# Altium PCB ZERORULERV2.PcbDoc (part 2 of 2)
Units mm, origin at the board's own origin, x right, y up, seen from the top; angles counter-clockwise.
Board outline 204.36 x 30 mm, 2 copper layers (Top, Bottom), stack 1.569 mm thick; 78 components, 0 nets, 1415 pads, 0 vias.
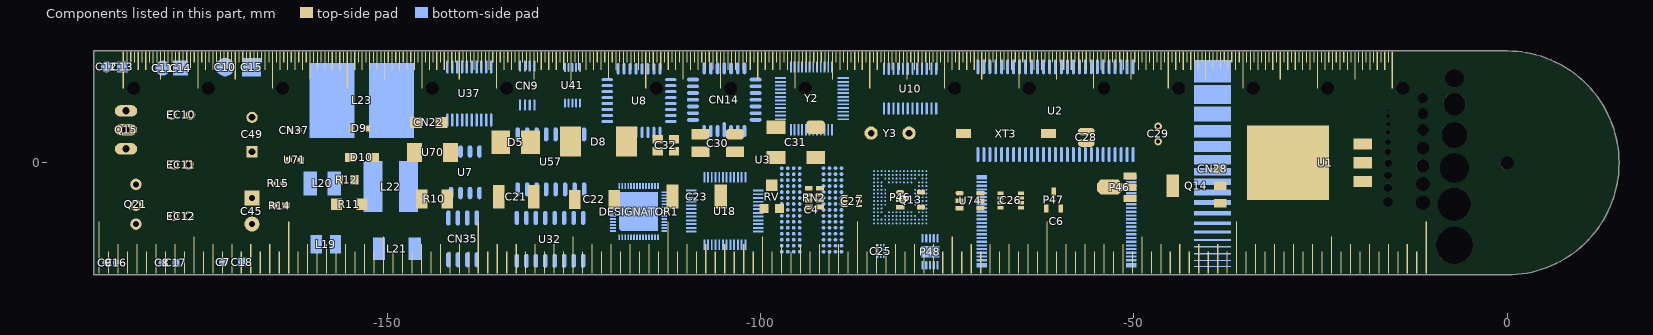
[diagram p2: the components of this part, seen from the top]

## Nets (pads, with @x,y where several pads share a name; then routed paths per layer and width w, separated by ;. In a path a pad name is that pad's centre, name@x,y a point inside that pad or via, vN(x,y) a via of type N, cw(c..) or ccw(c..) an arc to the next point about the centre after c; other vN are vias at no path point) (continued)
copper on no net: | length 2810.4
  Top w0.1: 0,-15 0,-11 ; 0,-9 0,-5 ; 0,-3 0,-0.9 ; 0,11 0,15 ; 0.157,-0.886 0.521,-2.954 ; 0.156,0.886 0.521,2.954 ; 0.241,-13.79 0.262,-14.998 ; 0.241,13.79 0.262,14.998 ; 0.307,0.846 1.026,2.819 ; 0.308,-0.846 1.026,-2.819 ; 0.436,-4.981 0.784,-8.966 ; 0.436,4.981 0.784,8.966 ; 0.45,0.78 1.5,2.598 ; 0.45,-0.779 1.5,-2.598 ; 0.481,-13.784 0.524,-14.991 ; 0.481,13.784 0.523,14.991 ; 0.578,0.69 1.928,2.298 ; 0.579,-0.689 1.929,-2.298 ; 0.69,-0.578 2.298,-1.928 ; 0.689,0.579 2.298,1.929 ; 0.722,-13.773 0.785,-14.979 ; 0.722,13.773 0.785,14.979 ; 0.78,-0.45 2.598,-1.5 ; 0.779,0.45 2.598,1.5 ; 0.846,-0.307 2.819,-1.026 ; 0.846,0.308 2.819,1.026 ; 0.868,-4.924 1.563,-8.863 ; 0.868,4.924 1.563,8.863 ; 0.886,-0.156 2.954,-0.521 ; 0.886,0.157 2.954,0.521 ; 0.962,-13.759 1.046,-14.963 ; 0.962,13.759 1.046,14.963 ; 1.133,-12.951 1.307,-14.943 1.202,-13.74 ; 1.133,12.951 1.307,14.943 ; 1.294,-4.83 2.329,-8.693 ; 1.294,4.83 2.329,8.693 ; 1.442,-13.717 1.568,-14.918 ; 1.442,13.717 1.568,14.918 ; 1.681,-13.689 1.828,-14.888 ; 1.681,13.689 1.828,14.888 ; 1.71,-4.698 3.078,-8.457 ; 1.71,4.698 3.078,8.457 ; 1.91,-10.833 2.605,-14.772 ; 1.91,10.833 2.605,14.772 ; 1.919,-13.658 2.088,-14.854 ; 1.92,13.658 2.088,14.854 ; 2.113,-4.532 3.804,-8.157 ; 2.113,4.532 3.804,8.157 ; 2.158,-13.622 2.347,-14.815 ; 2.158,13.622 2.347,14.815 ; 2.5,-4.33 4.5,-7.794 ; 2.5,4.33 4.5,7.794 ; 2.632,-13.539 2.862,-14.724 ; 2.632,13.539 2.862,14.724 ; 2.868,-13.491 3.119,-14.672 ; 2.868,-4.096 5.162,-7.372 ; 2.868,4.096 5.162,7.372 ; 2.868,13.491 3.119,14.672 ; 3.103,-13.439 3.374,-14.616 ; 3.103,13.439 3.374,14.616 ; 3.214,-3.83 5.785,-6.894 ; 3.214,3.83 5.785,6.894 ; 3.337,-13.382 3.629,-14.554 ; 3.337,13.382 3.629,14.554 ; 3.365,-12.557 3.882,-14.489 3.57,-13.322 ; 3.365,12.557 3.882,14.489 3.57,13.322 ; 3.536,-3.536 6.364,-6.364 ; 3.536,3.536 6.364,6.364 ; 3.762,-10.337 5.13,-14.095 ; 3.762,10.337 5.13,14.095 ; 3.802,-13.258 4.135,-14.419 ; 3.802,13.258 4.135,14.419 ; 3.83,-3.214 6.894,-5.785 ; 3.83,3.214 6.894,5.785 ; 4.032,-13.19 4.386,-14.345 ; 4.032,13.19 4.386,14.345 ; 4.096,-2.868 7.372,-5.162 ; 4.096,2.868 7.372,5.162 ; 4.262,-13.117 4.635,-14.266 ; 4.262,13.117 4.635,14.266 ; 4.33,-2.5 7.794,-4.5 ; 4.33,2.5 7.794,4.5 ; 4.49,-13.041 4.884,-14.183 ; 4.49,13.041 4.884,14.183 ; 4.532,-2.113 8.157,-3.804 ; 4.532,2.113 8.157,3.804 ; 4.698,-1.71 8.457,-3.078 ; 4.698,1.71 8.457,3.078 ; 4.83,-1.294 8.693,-2.329 ; 4.83,1.294 8.693,2.329 ; 4.924,-0.868 8.863,-1.563 ; 4.924,0.868 8.863,1.563 ; 4.943,-12.876 5.376,-14.004 ; 4.943,12.876 5.376,14.004 ; 4.981,-0.436 8.966,-0.784 ; 4.981,0.436 8.966,0.784 ; 5.167,-12.788 5.619,-13.908 ; 5.167,12.788 5.619,13.908 ; 5.389,-12.696 5.861,-13.808 ; 5.389,12.696 5.861,13.808 ; 5.494,-11.782 6.339,-13.595 5.829,-12.5 ; 5.494,11.782 6.339,13.595 5.829,12.5 ; 5.5,-9.526 7.5,-12.99 ; 5.5,9.526 7.5,12.99 ; 5.61,-12.6 6.101,-13.703 ; 5.61,12.6 6.101,13.703 ; 6.046,-12.396 6.576,-13.482 ; 6.046,12.396 6.576,13.482 ; 6.262,-12.289 6.81,-13.365 ; 6.262,12.289 6.81,13.365 ; 6.475,-12.178 7.042,-13.244 ; 6.475,12.178 7.042,13.244 ; 6.687,-12.063 7.272,-13.119 ; 6.687,12.063 7.272,13.119 ; 7.071,-8.426 9.642,-11.491 ; 7.071,8.426 9.642,11.491 ; 7.103,-11.822 7.726,-12.858 ; 7.104,11.822 7.726,12.858 ; 7.309,-11.696 7.949,-12.721 ; 7.309,11.696 7.949,12.721 ; 7.456,-10.649 8.604,-12.287 7.911,-11.298 ; 7.456,10.649 8.604,12.287 7.911,11.298 ; 7.512,-11.567 8.17,-12.58 ; 7.512,11.567 8.17,12.58 ; 7.712,-11.434 8.388,-12.436 ; 7.713,11.434 8.388,12.436 ; 8.107,-11.158 8.817,-12.135 ; 8.107,11.158 8.817,12.135 ; 8.3,-11.015 9.027,-11.98 ; 8.3,11.015 9.027,11.98 ; 8.426,-7.071 11.491,-9.642 ; 8.426,7.071 11.491,9.642 ; 8.491,-10.868 9.235,-11.82 ; 8.491,10.868 9.235,11.82 ; 8.68,-10.719 9.44,-11.657 ; 8.68,10.719 9.44,11.657 ; 9.048,-10.409 9.841,-11.321 ; 9.048,10.409 9.841,11.321 ; 9.192,-9.192 10.607,-10.607 9.753,-9.753 ; 9.192,9.192 10.607,10.607 9.753,9.753 ; 9.229,-10.25 10.037,-11.147 ; 9.229,10.25 10.037,11.147 ; 9.406,-10.087 10.23,-10.97 ; 9.406,10.087 10.23,10.97 ; 9.526,-5.5 12.99,-7.5 ; 9.526,5.5 12.99,7.5 ; 9.581,-9.921 10.42,-10.79 ; 9.581,9.921 10.42,10.79 ; 9.921,-9.581 10.79,-10.42 ; 9.921,9.581 10.79,10.42 ; 10.087,-9.406 10.97,-10.23 ; 10.087,9.406 10.97,10.23 ; 10.25,-9.229 11.147,-10.037 ; 10.25,9.229 11.147,10.037 ; 10.337,-3.762 14.095,-5.13 ; 10.337,3.762 14.095,5.13 ; 10.409,-9.048 11.321,-9.841 ; 10.409,9.048 11.321,9.841 ; 10.649,-7.456 12.287,-8.604 11.298,-7.911 ; 10.649,7.456 12.287,8.604 11.298,7.911 ; 10.719,-8.68 11.657,-9.44 ; 10.719,8.68 11.657,9.44 ; 10.833,-1.91 14.772,-2.605 ; 10.833,1.91 14.772,2.605 ; 10.868,-8.491 11.82,-9.235 ; 10.868,8.491 11.82,9.235 ; 11,0 15,0 ; 11.015,-8.3 11.98,-9.027 ; 11.015,8.3 11.98,9.027 ; 11.158,-8.107 12.135,-8.817 ; 11.158,8.107 12.135,8.817 ; 11.434,-7.712 12.436,-8.388 ; 11.434,7.712 12.436,8.388 ; 11.567,-7.512 12.58,-8.17 ; 11.567,7.512 12.58,8.17 ; 11.696,-7.309 12.721,-7.949 ; 11.696,7.309 12.721,7.949 ; 11.782,-5.494 13.595,-6.339 12.5,-5.829 ; 11.782,5.494 13.595,6.339 12.5,5.829 ; 11.822,-7.104 12.858,-7.726 ; 11.822,7.103 12.858,7.726 ; 12.063,-6.687 13.119,-7.272 ; 12.063,6.687 13.119,7.272 ; 12.178,-6.475 13.244,-7.042 ; 12.178,6.475 13.244,7.042 ; 12.289,-6.262 13.365,-6.81 ; 12.289,6.262 13.365,6.81 ; 12.396,-6.046 13.482,-6.576 ; 12.396,6.046 13.482,6.576 ; 12.557,-3.365 14.489,-3.882 13.322,-3.57 ; 12.557,3.365 14.489,3.882 13.322,3.57 ; 12.6,-5.61 13.703,-6.101 ; 12.6,5.61 13.703,6.101 ; 12.696,-5.389 13.808,-5.861 ; 12.696,5.389 13.808,5.861 ; 12.788,-5.167 13.908,-5.619 ; 12.788,5.167 13.908,5.619 ; 12.876,-4.943 14.004,-5.376 ; 12.876,4.943 14.004,5.376 ; 12.951,-1.133 14.943,-1.307 13.74,-1.202 ; 12.951,1.133 14.943,1.307 13.74,1.202 ; 13.041,-4.49 14.183,-4.884 ; 13.041,4.49 14.183,4.884 ; 13.117,-4.262 14.266,-4.635 ; 13.117,4.262 14.266,4.635 ; 13.19,-4.032 14.345,-4.386 ; 13.19,4.032 14.345,4.386 ; 13.258,-3.802 14.419,-4.135 ; 13.258,3.802 14.419,4.135 ; 13.382,-3.337 14.554,-3.629 ; 13.382,3.337 14.554,3.629 ; 13.439,-3.103 14.616,-3.374 ; 13.439,3.103 14.616,3.374 ; 13.491,-2.868 14.672,-3.119 ; 13.491,2.868 14.672,3.119 ; 13.539,-2.632 14.724,-2.862 ; 13.539,2.632 14.724,2.862 ; 13.622,-2.158 14.815,-2.347 ; 13.622,2.158 14.815,2.347 ; 13.658,-1.92 14.854,-2.088 ; 13.658,1.919 14.854,2.088 ; 13.689,-1.681 14.888,-1.828 ; 13.689,1.681 14.888,1.828 ; 13.717,-1.442 14.918,-1.568 ; 13.717,1.442 14.918,1.568 ; 13.759,-0.962 14.963,-1.046 ; 13.759,0.962 14.963,1.046 ; 13.773,-0.722 14.979,-0.785 ; 13.773,0.722 14.979,0.785 ; 13.784,-0.481 14.991,-0.523 ; 13.784,0.481 14.991,0.524 ; 13.79,-0.241 14.998,-0.262 ; 13.79,0.241 14.998,0.262 ; 0,0.9 0,3 0,0.9 ; 0,5 0,9 0,5 ; 0.9,0 3,0 0.9,0 ; 5,0 9,0 5,0
  Top w0.127: -166.529,-3.812 -148.293,-3.812 ; -166.527,3.434 -137.565,3.434 ; -166.523,-0.736 -90.015,-0.736 ; -158.707,-7.176 -158.707,7.175 ; -148.311,-7.162 -148.311,7.18 ; -137.519,-7.088 -137.519,7.155 ; -127.969,-7.27 -127.969,7.087 ; -115.473,-7.094 -115.473,7.136 ; -110.068,-0.7 -110.068,7.055 ; -101.63,-7.198 -101.63,7.099 ; -95.813,-7.135 -95.813,-0.727 ; -89.989,-7.113 -89.989,7.162 ; -89.932,-1.456 -58.069,-1.456 ; -84.842,-7.131 -84.842,-1.456 ; -74.665,-7.148 -74.665,7.124 ; -69.059,-7.12 -69.059,-1.495 ; -63.413,-7.164 -63.413,-1.477 ; -58.035,-7.172 -58.035,7.134 ; -58.016,1.041 -36.897,1.041 ; -47.816,-7.138 -47.816,7.167 ; -36.836,-7.104 -36.836,7.143 ; -166.554,-7.18 -16.968,-7.18 -16.968,7.194 -166.554,7.194 -166.554,-7.18
  Bottom w0.1: 0,-15 0,-11 ; 0,-9 0,-5 ; 0,-3 0,-0.9 ; 0,11 0,15 ; 0.157,-0.886 0.521,-2.954 ; 0.156,0.886 0.521,2.954 ; 0.241,-13.79 0.262,-14.998 ; 0.241,13.79 0.262,14.998 ; 0.307,0.846 1.026,2.819 ; 0.308,-0.846 1.026,-2.819 ; 0.436,-4.981 0.784,-8.966 ; 0.436,4.981 0.784,8.966 ; 0.45,0.78 1.5,2.598 ; 0.45,-0.779 1.5,-2.598 ; 0.481,-13.784 0.524,-14.991 ; 0.481,13.784 0.523,14.991 ; 0.578,0.69 1.928,2.298 ; 0.579,-0.689 1.929,-2.298 ; 0.69,-0.578 2.298,-1.928 ; 0.689,0.579 2.298,1.929 ; 0.722,-13.773 0.785,-14.979 ; 0.722,13.773 0.785,14.979 ; 0.78,-0.45 2.598,-1.5 ; 0.779,0.45 2.598,1.5 ; 0.846,-0.307 2.819,-1.026 ; 0.846,0.308 2.819,1.026 ; 0.868,-4.924 1.563,-8.863 ; 0.868,4.924 1.563,8.863 ; 0.886,-0.156 2.954,-0.521 ; 0.886,0.157 2.954,0.521 ; 0.962,-13.759 1.046,-14.963 ; 0.962,13.759 1.046,14.963 ; 1.133,-12.951 1.307,-14.943 1.202,-13.74 ; 1.133,12.951 1.307,14.943 ; 1.294,-4.83 2.329,-8.693 ; 1.294,4.83 2.329,8.693 ; 1.442,-13.717 1.568,-14.918 ; 1.442,13.717 1.568,14.918 ; 1.681,-13.689 1.828,-14.888 ; 1.681,13.689 1.828,14.888 ; 1.71,-4.698 3.078,-8.457 ; 1.71,4.698 3.078,8.457 ; 1.91,-10.833 2.605,-14.772 ; 1.91,10.833 2.605,14.772 ; 1.919,-13.658 2.088,-14.854 ; 1.92,13.658 2.088,14.854 ; 2.113,-4.532 3.804,-8.157 ; 2.113,4.532 3.804,8.157 ; 2.158,-13.622 2.347,-14.815 ; 2.158,13.622 2.347,14.815 ; 2.5,-4.33 4.5,-7.794 ; 2.5,4.33 4.5,7.794 ; 2.632,-13.539 2.862,-14.724 ; 2.632,13.539 2.862,14.724 ; 2.868,-13.491 3.119,-14.672 ; 2.868,-4.096 5.162,-7.372 ; 2.868,4.096 5.162,7.372 ; 2.868,13.491 3.119,14.672 ; 3.103,-13.439 3.374,-14.616 ; 3.103,13.439 3.374,14.616 ; 3.214,-3.83 5.785,-6.894 ; 3.214,3.83 5.785,6.894 ; 3.337,-13.382 3.629,-14.554 ; 3.337,13.382 3.629,14.554 ; 3.365,-12.557 3.882,-14.489 3.57,-13.322 ; 3.365,12.557 3.882,14.489 3.57,13.322 ; 3.536,-3.536 6.364,-6.364 ; 3.536,3.536 6.364,6.364 ; 3.762,-10.337 5.13,-14.095 ; 3.762,10.337 5.13,14.095 ; 3.802,-13.258 4.135,-14.419 ; 3.802,13.258 4.135,14.419 ; 3.83,-3.214 6.894,-5.785 ; 3.83,3.214 6.894,5.785 ; 4.032,-13.19 4.386,-14.345 ; 4.032,13.19 4.386,14.345 ; 4.096,-2.868 7.372,-5.162 ; 4.096,2.868 7.372,5.162 ; 4.262,-13.117 4.635,-14.266 ; 4.262,13.117 4.635,14.266 ; 4.33,-2.5 7.794,-4.5 ; 4.33,2.5 7.794,4.5 ; 4.49,-13.041 4.884,-14.183 ; 4.49,13.041 4.884,14.183 ; 4.532,-2.113 8.157,-3.804 ; 4.532,2.113 8.157,3.804 ; 4.698,-1.71 8.457,-3.078 ; 4.698,1.71 8.457,3.078 ; 4.83,-1.294 8.693,-2.329 ; 4.83,1.294 8.693,2.329 ; 4.924,-0.868 8.863,-1.563 ; 4.924,0.868 8.863,1.563 ; 4.943,-12.876 5.376,-14.004 ; 4.943,12.876 5.376,14.004 ; 4.981,-0.436 8.966,-0.784 ; 4.981,0.436 8.966,0.784 ; 5.167,-12.788 5.619,-13.908 ; 5.167,12.788 5.619,13.908 ; 5.389,-12.696 5.861,-13.808 ; 5.389,12.696 5.861,13.808 ; 5.494,-11.782 6.339,-13.595 5.829,-12.5 ; 5.494,11.782 6.339,13.595 5.829,12.5 ; 5.5,-9.526 7.5,-12.99 ; 5.5,9.526 7.5,12.99 ; 5.61,-12.6 6.101,-13.703 ; 5.61,12.6 6.101,13.703 ; 6.046,-12.396 6.576,-13.482 ; 6.046,12.396 6.576,13.482 ; 6.262,-12.289 6.81,-13.365 ; 6.262,12.289 6.81,13.365 ; 6.475,-12.178 7.042,-13.244 ; 6.475,12.178 7.042,13.244 ; 6.687,-12.063 7.272,-13.119 ; 6.687,12.063 7.272,13.119 ; 7.071,-8.426 9.642,-11.491 ; 7.071,8.426 9.642,11.491 ; 7.103,-11.822 7.726,-12.858 ; 7.104,11.822 7.726,12.858 ; 7.309,-11.696 7.949,-12.721 ; 7.309,11.696 7.949,12.721 ; 7.456,-10.649 8.604,-12.287 7.911,-11.298 ; 7.456,10.649 8.604,12.287 7.911,11.298 ; 7.512,-11.567 8.17,-12.58 ; 7.512,11.567 8.17,12.58 ; 7.712,-11.434 8.388,-12.436 ; 7.713,11.434 8.388,12.436 ; 8.107,-11.158 8.817,-12.135 ; 8.107,11.158 8.817,12.135 ; 8.3,-11.015 9.027,-11.98 ; 8.3,11.015 9.027,11.98 ; 8.426,-7.071 11.491,-9.642 ; 8.426,7.071 11.491,9.642 ; 8.491,-10.868 9.235,-11.82 ; 8.491,10.868 9.235,11.82 ; 8.68,-10.719 9.44,-11.657 ; 8.68,10.719 9.44,11.657 ; 9.048,-10.409 9.841,-11.321 ; 9.048,10.409 9.841,11.321 ; 9.192,-9.192 10.607,-10.607 9.753,-9.753 ; 9.192,9.192 10.607,10.607 9.753,9.753 ; 9.229,-10.25 10.037,-11.147 ; 9.229,10.25 10.037,11.147 ; 9.406,-10.087 10.23,-10.97 ; 9.406,10.087 10.23,10.97 ; 9.526,-5.5 12.99,-7.5 ; 9.526,5.5 12.99,7.5 ; 9.581,-9.921 10.42,-10.79 ; 9.581,9.921 10.42,10.79 ; 9.921,-9.581 10.79,-10.42 ; 9.921,9.581 10.79,10.42 ; 10.087,-9.406 10.97,-10.23 ; 10.087,9.406 10.97,10.23 ; 10.25,-9.229 11.147,-10.037 ; 10.25,9.229 11.147,10.037 ; 10.337,-3.762 14.095,-5.13 ; 10.337,3.762 14.095,5.13 ; 10.409,-9.048 11.321,-9.841 ; 10.409,9.048 11.321,9.841 ; 10.649,-7.456 12.287,-8.604 11.298,-7.911 ; 10.649,7.456 12.287,8.604 11.298,7.911 ; 10.719,-8.68 11.657,-9.44 ; 10.719,8.68 11.657,9.44 ; 10.833,-1.91 14.772,-2.605 ; 10.833,1.91 14.772,2.605 ; 10.868,-8.491 11.82,-9.235 ; 10.868,8.491 11.82,9.235 ; 11,0 15,0 ; 11.015,-8.3 11.98,-9.027 ; 11.015,8.3 11.98,9.027 ; 11.158,-8.107 12.135,-8.817 ; 11.158,8.107 12.135,8.817 ; 11.434,-7.712 12.436,-8.388 ; 11.434,7.712 12.436,8.388 ; 11.567,-7.512 12.58,-8.17 ; 11.567,7.512 12.58,8.17 ; 11.696,-7.309 12.721,-7.949 ; 11.696,7.309 12.721,7.949 ; 11.782,-5.494 13.595,-6.339 12.5,-5.829 ; 11.782,5.494 13.595,6.339 12.5,5.829 ; 11.822,-7.104 12.858,-7.726 ; 11.822,7.103 12.858,7.726 ; 12.063,-6.687 13.119,-7.272 ; 12.063,6.687 13.119,7.272 ; 12.178,-6.475 13.244,-7.042 ; 12.178,6.475 13.244,7.042 ; 12.289,-6.262 13.365,-6.81 ; 12.289,6.262 13.365,6.81 ; 12.396,-6.046 13.482,-6.576 ; 12.396,6.046 13.482,6.576 ; 12.557,-3.365 14.489,-3.882 13.322,-3.57 ; 12.557,3.365 14.489,3.882 13.322,3.57 ; 12.6,-5.61 13.703,-6.101 ; 12.6,5.61 13.703,6.101 ; 12.696,-5.389 13.808,-5.861 ; 12.696,5.389 13.808,5.861 ; 12.788,-5.167 13.908,-5.619 ; 12.788,5.167 13.908,5.619 ; 12.876,-4.943 14.004,-5.376 ; 12.876,4.943 14.004,5.376 ; 12.951,-1.133 14.943,-1.307 13.74,-1.202 ; 12.951,1.133 14.943,1.307 13.74,1.202 ; 13.041,-4.49 14.183,-4.884 ; 13.041,4.49 14.183,4.884 ; 13.117,-4.262 14.266,-4.635 ; 13.117,4.262 14.266,4.635 ; 13.19,-4.032 14.345,-4.386 ; 13.19,4.032 14.345,4.386 ; 13.258,-3.802 14.419,-4.135 ; 13.258,3.802 14.419,4.135 ; 13.382,-3.337 14.554,-3.629 ; 13.382,3.337 14.554,3.629 ; 13.439,-3.103 14.616,-3.374 ; 13.439,3.103 14.616,3.374 ; 13.491,-2.868 14.672,-3.119 ; 13.491,2.868 14.672,3.119 ; 13.539,-2.632 14.724,-2.862 ; 13.539,2.632 14.724,2.862 ; 13.622,-2.158 14.815,-2.347 ; 13.622,2.158 14.815,2.347 ; 13.658,-1.92 14.854,-2.088 ; 13.658,1.919 14.854,2.088 ; 13.689,-1.681 14.888,-1.828 ; 13.689,1.681 14.888,1.828 ; 13.717,-1.442 14.918,-1.568 ; 13.717,1.442 14.918,1.568 ; 13.759,-0.962 14.963,-1.046 ; 13.759,0.962 14.963,1.046 ; 13.773,-0.722 14.979,-0.785 ; 13.773,0.722 14.979,0.785 ; 13.784,-0.481 14.991,-0.523 ; 13.784,0.481 14.991,0.524 ; 13.79,-0.241 14.998,-0.262 ; 13.79,0.241 14.998,0.262 ; 0,0.9 0,3 0,0.9 ; 0,5 0,9 0,5 ; 0.9,0 3,0 0.9,0 ; 5,0 9,0 5,0
  Bottom w0.127: -188.744,11.215 -162.157,11.215 ; -188.73,-12.248 -162.169,-12.248 ; -188.696,-1.728 -181.398,-1.728 ; -181.401,-14.57 -181.401,14.398 ; -181.358,-4.592 -173.71,-4.592 ; -181.339,2.812 -173.718,2.812 ; -173.664,-14.52 -173.664,14.47 ; -173.619,-1.825 -162.158,-1.825 ; -162.097,-14.556 -162.097,14.486 ; -162.041,-8.553 -144.803,-8.553 ; -162.021,1.262 -144.705,1.262 ; -154.678,-14.561 -154.678,1.188 ; -144.746,-14.543 -144.746,14.446 ; -144.716,3.728 -135.24,3.728 ; -144.648,-5.657 -122.446,-5.657 ; -135.192,-14.549 -135.192,14.455 ; -135.115,5.537 -122.495,5.537 ; -129.149,5.613 -129.149,14.455 ; -122.449,-14.529 -122.449,14.405 ; -122.383,0.794 -87.661,0.794 ; -110.706,-14.543 -110.706,14.493 ; -99.025,-14.562 -99.025,14.449 ; -87.6,-14.535 -87.6,14.455 ; -87.585,2.321 -73.747,2.321 ; -87.584,5.692 -73.676,5.692 ; -87.539,-9.193 -73.714,-9.193 ; -81.826,-14.462 -81.826,-9.249 ; -73.634,-14.549 -73.634,14.486 ; -73.584,-1.077 -47.99,-1.077 ; -47.933,-14.538 -47.933,14.446 ; -45.871,-14.547 -45.871,14.482 ; -32.8,-14.513 -32.8,14.466 ; -188.756,-14.563 -2.995,-14.563 -2.995,14.497 -188.756,14.497 -188.756,-14.563

## Keep-outs
Keep-Out Layer:
  lines w0.01: -189.361,-15 -189.361,15 ; -189.361,-15 -189.361,15 ; -189.361,-15 0,-15 ccw(c0,0) 0,15 -189.361,15 ; -2,-11 -2,-9 0,-9 ccw(c0,0) 0,9 -2,9 -2,11 0,11 cw(c0,0) 0,-11 -2,-11 ; -2,-5 -2,-3 0,-3 ccw(c0,0) 0,3 -2,3 -2,5 0,5 cw(c0,0) 0,-5 -2,-5

## Other copper
Top:
  pour cut-out: -2,9 -2,11 0,11 cw(c0,0) 0,-11 -2,-11 -2,-9 0,-9 ccw(c0,0) 0,9
  text "1°" at -2.6,12 h3
  text "CM" at -13.805,11.734 h1.27
  text "0" at -0.9,11.5 h1.5
  text "0" at -0.9,11.5 h1.5
  text "1" at 1.111,11.482 h1.5 r350
  text "1" at 1.111,11.482 h1.5 r350
  text "1" at -184.5,11.3 h1.5
  text "2" at -183.5,11.3 h1.5
  text "3" at -182.5,11.3 h1.5
  text "4" at -181.5,11.3 h1.5
  text "6" at -179.5,11.3 h1.5
  text "7" at -178.5,11.3 h1.5
  text "8" at -177.5,11.3 h1.5
  text "9" at -176.5,11.3 h1.5
  text "1" at -174.5,11.3 h1.5
  text "2" at -173.5,11.3 h1.5
  text "3" at -172.5,11.3 h1.5
  text "4" at -171.5,11.3 h1.5
  text "6" at -169.5,11.3 h1.5
  text "7" at -168.5,11.3 h1.5
  text "8" at -167.5,11.3 h1.5
  text "9" at -166.5,11.3 h1.5
  text "1" at -164.5,11.3 h1.5
  text "2" at -163.5,11.3 h1.5
  text "3" at -162.5,11.3 h1.5
  text "4" at -161.5,11.3 h1.5
  text "6" at -159.5,11.3 h1.5
  text "7" at -158.5,11.3 h1.5
  text "8" at -157.5,11.3 h1.5
  text "9" at -156.5,11.3 h1.5
  text "1" at -154.5,11.3 h1.5
  text "2" at -153.5,11.3 h1.5
  text "3" at -152.5,11.3 h1.5
  text "4" at -151.5,11.3 h1.5
  text "6" at -149.5,11.3 h1.5
  text "7" at -148.5,11.3 h1.5
  text "8" at -147.5,11.3 h1.5
  text "9" at -146.5,11.3 h1.5
  text "1" at -144.5,11.3 h1.5
  text "2" at -143.5,11.3 h1.5
  text "3" at -142.5,11.3 h1.5
  text "4" at -141.5,11.3 h1.5
  text "6" at -139.5,11.3 h1.5
  text "7" at -138.5,11.3 h1.5
  text "8" at -137.5,11.3 h1.5
  text "9" at -136.5,11.3 h1.5
  text "1" at -134.5,11.3 h1.5
  text "2" at -133.5,11.3 h1.5
  text "3" at -132.5,11.3 h1.5
  text "4" at -131.5,11.3 h1.5
  text "6" at -129.5,11.3 h1.5
  text "7" at -128.5,11.3 h1.5
  text "8" at -127.5,11.3 h1.5
  text "9" at -126.5,11.3 h1.5
  text "1" at -124.5,11.3 h1.5
  text "2" at -123.5,11.3 h1.5
  text "3" at -122.5,11.3 h1.5
  text "4" at -121.5,11.3 h1.5
  text "6" at -119.5,11.3 h1.5
  text "7" at -118.5,11.3 h1.5
  text "8" at -117.5,11.3 h1.5
  text "9" at -116.5,11.3 h1.5
  text "1" at -114.5,11.3 h1.5
  text "2" at -113.5,11.3 h1.5
  text "3" at -112.5,11.3 h1.5
  text "4" at -111.5,11.3 h1.5
  text "6" at -109.5,11.3 h1.5
  text "7" at -108.5,11.3 h1.5
  text "8" at -107.5,11.3 h1.5
  text "9" at -106.5,11.3 h1.5
  text "1" at -104.5,11.3 h1.5
  text "2" at -103.5,11.3 h1.5
  text "3" at -102.5,11.3 h1.5
  text "4" at -101.5,11.3 h1.5
  text "6" at -99.5,11.3 h1.5
  text "7" at -98.5,11.3 h1.5
  text "8" at -97.5,11.3 h1.5
  text "9" at -96.5,11.3 h1.5
  text "1" at -94.5,11.3 h1.5
  text "2" at -93.5,11.3 h1.5
  text "3" at -92.5,11.3 h1.5
  text "4" at -91.5,11.3 h1.5
  text "6" at -89.5,11.3 h1.5
  text "7" at -88.5,11.3 h1.5
  text "8" at -87.5,11.3 h1.5
  text "9" at -86.5,11.3 h1.5
  text "1" at -84.5,11.3 h1.5
  text "2" at -83.5,11.3 h1.5
  text "3" at -82.5,11.3 h1.5
  text "4" at -81.5,11.3 h1.5
  text "6" at -79.5,11.3 h1.5
  text "7" at -78.5,11.3 h1.5
  text "8" at -77.5,11.3 h1.5
  text "9" at -76.5,11.3 h1.5
  text "1" at -74.5,11.3 h1.5
  text "2" at -73.5,11.3 h1.5
  text "3" at -72.5,11.3 h1.5
  text "4" at -71.5,11.3 h1.5
  text "6" at -69.5,11.3 h1.5
  text "7" at -68.5,11.3 h1.5
  text "8" at -67.5,11.3 h1.5
  text "9" at -66.5,11.3 h1.5
  text "1" at -64.5,11.3 h1.5
  text "2" at -63.5,11.3 h1.5
  text "3" at -62.5,11.3 h1.5
  text "4" at -61.5,11.3 h1.5
  text "6" at -59.5,11.3 h1.5
  text "7" at -58.5,11.3 h1.5
  text "8" at -57.5,11.3 h1.5
  text "9" at -56.5,11.3 h1.5
  text "1" at -54.5,11.3 h1.5
  text "2" at -53.5,11.3 h1.5
  text "3" at -52.5,11.3 h1.5
  text "4" at -51.5,11.3 h1.5
  text "6" at -49.5,11.3 h1.5
  text "7" at -48.5,11.3 h1.5
  text "8" at -47.5,11.3 h1.5
  text "9" at -46.5,11.3 h1.5
  text "1" at -44.5,11.3 h1.5
  text "2" at -43.5,11.3 h1.5
  text "3" at -42.5,11.3 h1.5
  text "4" at -41.5,11.3 h1.5
  text "6" at -39.5,11.3 h1.5
  text "7" at -38.5,11.3 h1.5
  text "8" at -37.5,11.3 h1.5
  text "9" at -36.5,11.3 h1.5
  text "1" at -34.5,11.3 h1.5
  text "2" at -33.5,11.3 h1.5
  text "3" at -32.5,11.3 h1.5
  text "4" at -31.5,11.3 h1.5
  text "6" at -29.5,11.3 h1.5
  text "7" at -28.5,11.3 h1.5
  text "8" at -27.5,11.3 h1.5
  text "9" at -26.5,11.3 h1.5
  text "1" at -24.5,11.3 h1.5
  text "2" at -23.5,11.3 h1.5
  text "3" at -22.5,11.3 h1.5
  text "4" at -21.5,11.3 h1.5
  text "6" at -19.5,11.3 h1.5
  text "7" at -18.5,11.3 h1.5
  text "8" at -17.5,11.3 h1.5
  text "9" at -16.5,11.3 h1.5
  text "2" at 3.088,11.114 h1.5 r340
  text "2" at 3.088,11.114 h1.5 r340
  text "3" at 4.971,10.409 h1.5 r330
  text "3" at 4.971,10.409 h1.5 r330
  text "5" at -180.6,10 h1.5
  text "5" at -170.6,9.95 h1.5
  text "5" at -160.6,9.95 h1.5
  text "5" at -150.6,9.95 h1.5
  text "5" at -140.6,9.95 h1.5
  text "5" at -130.6,9.95 h1.5
  text "5" at -120.6,9.95 h1.5
  text "5" at -110.6,9.95 h1.5
  text "5" at -100.6,9.95 h1.5
  text "5" at -90.6,9.95 h1.5
  text "5" at -80.6,9.95 h1.5
  text "5" at -70.6,9.95 h1.5
  text "5" at -60.6,9.95 h1.5
  text "5" at -50.6,9.95 h1.5
  text "5" at -40.6,9.95 h1.5
  text "5" at -30.6,9.95 h1.5
  text "5" at -20.6,9.95 h1.5
  text "4" at 6.703,9.388 h1.5 r320
  text "4" at 6.703,9.388 h1.5 r320
  text "0" at -187.2,8.5 h3
  text "1" at -177.2,8.5 h3
  text "2" at -167.2,8.5 h3
  text "3" at -157.2,8.5 h3
  text "4" at -147.2,8.5 h3
  text "5" at -137.2,8.5 h3
  text "6" at -127.2,8.5 h3
  text "7" at -117.2,8.5 h3
  text "8" at -107.2,8.5 h3
  text "9" at -97.2,8.5 h3
  text "10" at -88.2,8.5 h3
  text "11" at -78.2,8.5 h3
  text "12" at -68.2,8.5 h3
  text "13" at -58.2,8.5 h3
  text "14" at -48.2,8.5 h3
  text "15" at -38.2,8.5 h3
  text "16" at -28.2,8.5 h3
  text "17" at -18.2,8.5 h3
  text "5" at 8.231,8.081 h1.5 r310
  text "5" at 8.231,8.081 h1.5 r310
  text "6" at 9.509,6.529 h1.5 r300
  text "6" at 9.509,6.529 h1.5 r300
  text "5°" at -2.8,6.3 h3
  text "7" at 10.499,4.779 h1.5 r290
  text "7" at 10.499,4.779 h1.5 r290
  text "PCB Common" at -182.614,3.498 h2.3
  text "8" at 11.169,2.883 h1.5 r280
  text "8" at 11.169,2.883 h1.5 r280
  text "10°" at -2.7,1.5 h1.5
  text "Footprint:" at -182.755,0.994 h2.3
  text "9" at 11.5,0.9 h1.5 r270
  text "9" at 11.5,0.9 h1.5 r270
  text "10" at 11.603,-0.421 h1.5 r260
  text "10" at 11.603,-0.421 h1.5 r260
  text "11" at 11.354,-2.43 h1.5 r250
  text "11" at 11.354,-2.43 h1.5 r250
  text "Zero Ruler V2" at -182.239,-3.14 h2.3
  text "12" at 10.759,-4.364 h1.5 r240
  text "12" at 10.759,-4.364 h1.5 r240
  text "By Toney" at -182.122,-5.984 h2.3
  text "13" at 9.838,-6.166 h1.5 r230
  text "13" at 9.838,-6.166 h1.5 r230
  text "Inch" at -12.7,-7.112 h1.27 r180
  text "7" at -186.85,-7.65 h3 r180
  text "6" at -161.5,-7.65 h3 r180
  text "5" at -136.1,-7.65 h3 r180
  text "4" at -110.7,-7.65 h3 r180
  text "3" at -85.3,-7.65 h3 r180
  text "2" at -59.9,-7.65 h3 r180
  text "1" at -34.5,-7.65 h3 r180
  text "0" at -9.1,-7.65 h3 r180
  text "14" at 8.618,-7.781 h1.5 r220
  text "14" at 8.618,-7.781 h1.5 r220
  text "5" at -175.768,-8.382 h1.5 r180
  text "5" at -150.368,-8.382 h1.5 r180
  text "5" at -124.968,-8.382 h1.5 r180
  text "5" at -99.568,-8.382 h1.5 r180
  text "5" at -74.168,-8.382 h1.5 r180
  text "5" at -48.768,-8.382 h1.5 r180
  text "5" at -23.368,-8.382 h1.5 r180
  text "15" at 7.136,-9.159 h1.5 r210
  text "15" at 7.136,-9.159 h1.5 r210
  text "9" at -185.928,-9.398 h1.5 r180
  text "8" at -183.388,-9.398 h1.5 r180
  text "7" at -180.848,-9.398 h1.5 r180
  text "6" at -178.308,-9.398 h1.5 r180
  text "4" at -173.228,-9.398 h1.5 r180
  text "3" at -170.688,-9.398 h1.5 r180
  text "2" at -168.148,-9.398 h1.5 r180
  text "1" at -165.608,-9.398 h1.5 r180
  text "9" at -160.528,-9.398 h1.5 r180
  text "8" at -157.988,-9.398 h1.5 r180
  text "7" at -155.448,-9.398 h1.5 r180
  text "6" at -152.908,-9.398 h1.5 r180
  text "4" at -147.828,-9.398 h1.5 r180
  text "3" at -145.288,-9.398 h1.5 r180
  text "2" at -142.748,-9.398 h1.5 r180
  text "1" at -140.208,-9.398 h1.5 r180
  text "9" at -135.128,-9.398 h1.5 r180
  text "8" at -132.588,-9.398 h1.5 r180
  text "7" at -130.048,-9.398 h1.5 r180
  text "6" at -127.508,-9.398 h1.5 r180
  text "4" at -122.428,-9.398 h1.5 r180
  text "3" at -119.888,-9.398 h1.5 r180
  text "2" at -117.348,-9.398 h1.5 r180
  text "1" at -114.808,-9.398 h1.5 r180
  text "9" at -109.728,-9.398 h1.5 r180
  text "8" at -107.188,-9.398 h1.5 r180
  text "7" at -104.648,-9.398 h1.5 r180
  text "6" at -102.108,-9.398 h1.5 r180
  text "4" at -97.028,-9.398 h1.5 r180
  text "3" at -94.488,-9.398 h1.5 r180
  text "2" at -91.948,-9.398 h1.5 r180
  text "1" at -89.408,-9.398 h1.5 r180
  text "9" at -84.328,-9.398 h1.5 r180
  text "8" at -81.788,-9.398 h1.5 r180
  text "7" at -79.248,-9.398 h1.5 r180
  text "6" at -76.708,-9.398 h1.5 r180
  text "4" at -71.628,-9.398 h1.5 r180
  text "3" at -69.088,-9.398 h1.5 r180
  text "2" at -66.548,-9.398 h1.5 r180
  text "1" at -64.008,-9.398 h1.5 r180
  text "9" at -58.928,-9.398 h1.5 r180
  text "8" at -56.388,-9.398 h1.5 r180
  text "7" at -53.848,-9.398 h1.5 r180
  text "6" at -51.308,-9.398 h1.5 r180
  text "4" at -46.228,-9.398 h1.5 r180
  text "3" at -43.688,-9.398 h1.5 r180
  text "2" at -41.148,-9.398 h1.5 r180
  text "1" at -38.608,-9.398 h1.5 r180
  text "9" at -33.528,-9.398 h1.5 r180
  text "8" at -30.988,-9.398 h1.5 r180
  text "7" at -28.448,-9.398 h1.5 r180
  text "6" at -25.908,-9.398 h1.5 r180
  text "4" at -20.828,-9.398 h1.5 r180
  text "3" at -18.288,-9.398 h1.5 r180
  text "2" at -15.748,-9.398 h1.5 r180
  text "1" at -13.208,-9.398 h1.5 r180
  text "16" at 5.437,-10.259 h1.5 r200
  text "16" at 5.437,-10.259 h1.5 r200
  text "17" at 3.573,-11.047 h1.5 r190
  text "17" at 3.573,-11.047 h1.5 r190
  text "18" at 1.6,-11.5 h1.5 r180
  text "18" at 1.6,-11.5 h1.5 r180
Bottom:
  text "ABCDEFG 0.6MM" at -31.534,13.422 h0.3 r180
  text "MM" at -36.6,13.2 h2.38 r180
  text "3.0" at -43.733,12.543 h0.64 r180
  text "ABCDEFG 0.8MM" at -31.661,12.075 h0.4 r180
  text "0" at -0.3,11.4 h1.5
  text "0" at -0.3,11.4 h1.5
  text "1" at 1.684,11.279 h1.5 r350
  text "2.5" at -5.078,10.809 h0.64 r270
  text "2" at 3.617,10.815 h1.5 r340
  text "ABCDEFG 1.0MM" at -31.73,10.432 h0.5 r180
  text "3" at 5.44,10.023 h1.5 r330
  text "1.4" at -13.356,9.116 h0.64 r180
  text "4" at 7.098,8.926 h1.5 r320
  text "ABCDEFG 1.27MM" at -31.899,8.66 h0.64 r180
  text "2.5" at -43.9,8.6 h0.64 r180
  text "0.2" at -18.078,8.45 h0.64 r180
  text "0.3" at -15.283,7.642 h0.64 r180
  text "5" at 8.54,7.558 h1.5 r310
  text "1.5" at -10.344,7.244 h0.64 r180
  text "3.0" at -4.825,7.126 h0.64 r270
  text "2.0" at -43.948,6.796 h0.64 r180
  text "0.5" at -18.124,6.748 h0.64 r180
  text "ABCDEFG1.524MM" at -32.084,6.357 h0.76 r180
  text "6" at 9.723,5.96 h1.5 r300
  text "0.6" at -15.258,5.593 h0.64 r180
  text "Unit" at -35.5,5 h2.38 r270
  text "1.6" at -13.552,4.755 h0.64 r180
  text "1.7" at -43.72,4.673 h0.64 r180
  text "0.7" at -18.104,4.533 h0.64 r180
  text "7" at 10.61,4.181 h1.5 r290
  text "ABCDEFG 2.0MM" at -32.103,3.893 h1 r180
  text "MM" at -35.842,3.292 h2 r180
  text "3.5" at -4.634,3.273 h0.64 r270
  text "0.8" at -15.154,3.213 h0.64 r180
  text "1.7" at -9.959,2.656 h0.64 r180
  text "1.524" at -45,2.565 h0.64 r180
  text "8" at 11.175,2.275 h1.5 r280
  text "0.9" at -18.131,1.925 h0.64 r180
  text "K&S 3.0MM" at -32.408,1.025 h3 r180
  text "1.27" at -44.385,0.707 h0.64 r180
  text "1.0" at -15.146,0.552 h0.64 r180
  text "9" at 11.4,0.3 h1.5 r270
  text "1.8" at -13.618,-0.045 h0.64 r180
  text "1.0" at -43.667,-0.764 h0.64 r180
  text "4.0" at -4.573,-1.068 h0.64 r270
  text "1.1" at -18.079,-1.238 h0.64 r180
  text "10°" at -2.1,-1.5 h1.5 r180
  text "10" at 11.279,-1.684 h1.5 r260
  text "0.9" at -43.806,-2.083 h0.64 r180
  text "1.9" at -10.004,-2.289 h0.64 r180
  text "1.2" at -14.974,-2.872 h0.64 r180
  text "K&S 2.54MM" at -32.203,-2.983 h2.54 r180
  text "Unit" at -35.376,-3.064 h2 r270
  text "0.8" at -43.8,-3.4 h0.64 r180
  text "11" at 10.815,-3.617 h1.5 r250
  text "MM" at -35.65,-4.391 h1.5 r180
  text "1.3" at -18.072,-4.823 h0.64 r180
  text "2.0" at -13.907,-4.844 h0.64 r180
  text "0.7" at -43.816,-4.863 h0.64 r180
  text "12" at 10.023,-5.44 h1.5 r240
  text "4.5" at -4.55,-5.969 h0.64 r270
  text "KickStarter 2.0MM" at -31.883,-6.205 h2 r180
  text "0.6" at -43.857,-6.331 h0.64 r180
  text "5°" at -2.5,-6.7 h3 r180
  text "13" at 8.926,-7.098 h1.5 r230
  text "0.5" at -43.785,-7.673 h0.64 r180
  text "14" at 7.558,-8.54 h1.5 r220
  text "KickStarter 1.524MM" at -31.566,-8.918 h1.52 r180
  text "0.4" at -43.679,-8.991 h0.64 r180
  text "Unit" at -35.376,-9.114 h1.5 r270
  text "15" at 5.96,-9.723 h1.5 r210
  text "0.3" at -36.506,-9.922 h0.64 r180
  text "16" at 4.181,-10.61 h1.5 r200
  text "KickStarter 1.27MM" at -31.423,-10.939 h1.27 r180
  text "0.254" at -45.148,-11.015 h0.64 r180
  text "17" at 2.275,-11.175 h1.5 r190
  text "18" at 0.3,-11.4 h1.5 r180
  text "5.0" at -4.367,-11.45 h0.64 r270
  text "0.1524" at -36.505,-11.719 h0.64 r180
  text "1°" at -2.4,-11.8 h3 r180
  text "0.127" at -44.792,-12.494 h0.64 r180
  text "KickStarter 1.0MM" at -31.258,-12.941 h1 r180
  text "0.1MM" at -36.406,-13.383 h0.64 r180

## Silkscreen, mask and mechanical layers (free items; w line width, h text height)
Silkscreen Top:
  text "XT7535" at -97.204,6.057 h0.64
  text "SMC" at -122.769,5.936 h0.64
  text "SOD323" at -155.579,5.749 h0.64
  text "XT2X6D" at -45.419,5.767 h0.64
  text "(SMT)" at -52.084,5.708 h0.64
  text "(DIP)" at -40.698,5.715 h0.64
  text "XT2X6D" at -56.665,5.634 h0.64
  text "XT6035" at -107.787,5.599 h0.64
  text "SOD723" at -163.932,5.513 h0.64
  text "SMB" at -133.681,5.466 h0.64
  text "XT3225" at -114.592,5.182 h0.64
  text "SOD8" at -140.947,5.083 h0.64
  text "SOD123" at -155.279,2.123 h0.64
  text "SOD523" at -163.928,1.666 h0.64
  text "SMA" at -139.939,0.914 h0.64
  text "XT49S" at -71.113,-0.342 h0.64
  text "(SMT)" at -66.693,-0.332 h0.64
  text "XT49S" at -85.5,-0.4 h0.64
  text "(DIP)" at -81.1,-0.6 h0.64
  text "TO-252" at -35.603,-1.784 h0.64 r90
  text "0805" at -152.16,-1.799 h0.64
  text "(4832)" at -133.488,-1.852 h0.64
  text "0402" at -162.373,-1.917 h0.64
  text "1812" at -135.993,-1.927 h0.64
  text "2512 (6432)" at -111.594,-1.983 h0.64
  text "(3225)" at -143.631,-2.164 h0.64
  text "RP0603" at -94.898,-2.161 h0.64
  text "1210" at -146.14,-2.224 h0.64
  text "(5025)" at -122.608,-2.234 h0.64
  text "2010" at -125.327,-2.287 h0.64
  text "SOT23" at -62.209,-2.673 h0.64
  text "SOT28" at -68.122,-2.699 h0.64
  text "SOT26" at -73.543,-2.774 h0.64
  text "SOT25" at -81.458,-2.795 h0.64
  text "SC70-6" at -89.476,-3.06 h0.64
  text "(2012)" at -152.501,-3.166 h0.64
  text "(1005)" at -162.535,-3.23 h0.64
  text "SOT223" at -46.202,-5.045 h0.64 r90
  text "0603" at -161.986,-5.126 h0.64
  text "1206" at -151.319,-5.207 h0.64
  text "SOT89" at -56.391,-5.382 h0.64 r90
  text "(1608)" at -162.267,-6.461 h0.64
  text "(3216)" at -151.758,-6.56 h0.64
Silkscreen Bottom:
  lines w0.127: -188.756,-14.563 -188.756,-14.563 ; -188.756,14.497 -188.756,14.497 ; -2.995,-14.563 -2.995,-14.563 ; -2.995,14.497 -2.995,14.497
  text "TP2.5" at -165.668,13.336 h0.64 r180
  text "TP1.5" at -184.157,13.198 h0.64 r180
  text "TP2.0" at -176.4,13.1 h0.64 r180
  text "TSSOP10" at -127.522,12.493 h0.64 r90
  text "QSOP24" at -85.125,11.969 h0.64 r90
  text "DIPФ6" at -179.118,10.93 h1.27 r180
  text "DIPФ10" at -169.917,10.536 h1.27 r180
  text "(DIP)" at -47.245,10.158 h0.64 r270
  text "TSOP56" at -71.997,8.751 h0.64 r90
  text "SSOP20" at -143.2,8.5 h0.64 r90
  text "TSSOP8" at -133.4,6.6 h0.64 r180
  text "TO-220" at -187.6,6.1 h0.64 r90
  text "XT2X6D" at -47.323,5.74 h0.64 r270
  text "(DIP)" at -77,5 h0.64 r180
  text "XT49S" at -77.4,3.6 h0.64 r180
  text "TQFP48" at -95.076,2.972 h0.64 r180
  text "CD105" at -154.895,2.582 h0.64 r180
  text "QFP32" at -117.982,2.356 h0.64 r180
  text "PLCC28" at -107.3,2.268 h0.64 r180
  text "MBGA164" at -83.5,0.9 h0.64 r180
  text "SOJ8" at -143.039,0.178 h0.64 r90
  text "SOJ20" at -134.733,-2.013 h0.64 r270
  text "DIPФ5" at -179.642,-3.11 h1.27 r180
  text "TO-92" at -187.3,-4 h0.64 r90
  text "TSOP48" at -71.794,-5.67 h0.64 r90
  text "CD43/CD45" at -161.469,-6.184 h0.64 r180
  text "CD73" at -150.691,-7.348 h0.64 r180
  text "SOP8" at -143.172,-8.795 h0.64 r90
  text "DIPФ4" at -179.428,-9.681 h1.27 r180
  text "DIPФ8" at -170.211,-10.85 h1.27 r180
  text "QFN56" at -118.094,-11.786 h0.64 r180
  text "SOP20" at -134.848,-11.986 h0.64 r270
  text "LQFP48" at -107.053,-12.501 h0.64 r180
  text "TP1.2" at -167.452,-12.9 h0.64 r180
  text "TP0.8" at -185.213,-12.926 h0.64 r180
  text "TP1.0" at -176.667,-13.096 h0.64 r180
  text "DFN10" at -80.945,-13.17 h0.64 r270
  text "BGAP119P08" at -96.259,-13.215 h0.64 r180
  text "CD32" at -159.503,-13.245 h0.64 r180
  text "CD54" at -154.243,-13.26 h0.64 r180
  text "WQFN10" at -86.471,-13.677 h0.64 r270
Solder Mask Top:
  drawing of 285 lines, arcs and shapes, not listed
  text "1°" at -2.6,12 h3
  text "CM" at -13.805,11.734 h1.27
  text "0" at -0.9,11.5 h1.5
  text "1" at 1.111,11.482 h1.5 r350
  text "1" at -184.5,11.3 h1.5
  text "2" at -183.5,11.3 h1.5
  text "3" at -182.5,11.3 h1.5
  text "4" at -181.5,11.3 h1.5
  text "6" at -179.5,11.3 h1.5
  text "7" at -178.5,11.3 h1.5
  text "8" at -177.5,11.3 h1.5
  text "9" at -176.5,11.3 h1.5
  text "1" at -174.5,11.3 h1.5
  text "2" at -173.5,11.3 h1.5
  text "3" at -172.5,11.3 h1.5
  text "4" at -171.5,11.3 h1.5
  text "6" at -169.5,11.3 h1.5
  text "7" at -168.5,11.3 h1.5
  text "8" at -167.5,11.3 h1.5
  text "9" at -166.5,11.3 h1.5
  text "1" at -164.5,11.3 h1.5
  text "2" at -163.5,11.3 h1.5
  text "3" at -162.5,11.3 h1.5
  text "4" at -161.5,11.3 h1.5
  text "6" at -159.5,11.3 h1.5
  text "7" at -158.5,11.3 h1.5
  text "8" at -157.5,11.3 h1.5
  text "9" at -156.5,11.3 h1.5
  text "1" at -154.5,11.3 h1.5
  text "2" at -153.5,11.3 h1.5
  text "3" at -152.5,11.3 h1.5
  text "4" at -151.5,11.3 h1.5
  text "6" at -149.5,11.3 h1.5
  text "7" at -148.5,11.3 h1.5
  text "8" at -147.5,11.3 h1.5
  text "9" at -146.5,11.3 h1.5
  text "1" at -144.5,11.3 h1.5
  text "2" at -143.5,11.3 h1.5
  text "3" at -142.5,11.3 h1.5
  text "4" at -141.5,11.3 h1.5
  text "6" at -139.5,11.3 h1.5
  text "7" at -138.5,11.3 h1.5
  text "8" at -137.5,11.3 h1.5
  text "9" at -136.5,11.3 h1.5
  text "1" at -134.5,11.3 h1.5
  text "2" at -133.5,11.3 h1.5
  text "3" at -132.5,11.3 h1.5
  text "4" at -131.5,11.3 h1.5
  text "6" at -129.5,11.3 h1.5
  text "7" at -128.5,11.3 h1.5
  text "8" at -127.5,11.3 h1.5
  text "9" at -126.5,11.3 h1.5
  text "1" at -124.5,11.3 h1.5
  text "2" at -123.5,11.3 h1.5
  text "3" at -122.5,11.3 h1.5
  text "4" at -121.5,11.3 h1.5
  text "6" at -119.5,11.3 h1.5
  text "7" at -118.5,11.3 h1.5
  text "8" at -117.5,11.3 h1.5
  text "9" at -116.5,11.3 h1.5
  text "1" at -114.5,11.3 h1.5
  text "2" at -113.5,11.3 h1.5
  text "3" at -112.5,11.3 h1.5
  text "4" at -111.5,11.3 h1.5
  text "6" at -109.5,11.3 h1.5
  text "7" at -108.5,11.3 h1.5
  text "8" at -107.5,11.3 h1.5
  text "9" at -106.5,11.3 h1.5
  text "1" at -104.5,11.3 h1.5
  text "2" at -103.5,11.3 h1.5
  text "3" at -102.5,11.3 h1.5
  text "4" at -101.5,11.3 h1.5
  text "6" at -99.5,11.3 h1.5
  text "7" at -98.5,11.3 h1.5
  text "8" at -97.5,11.3 h1.5
  text "9" at -96.5,11.3 h1.5
  text "1" at -94.5,11.3 h1.5
  text "2" at -93.5,11.3 h1.5
  text "3" at -92.5,11.3 h1.5
  text "4" at -91.5,11.3 h1.5
  text "6" at -89.5,11.3 h1.5
  text "7" at -88.5,11.3 h1.5
  text "8" at -87.5,11.3 h1.5
  text "9" at -86.5,11.3 h1.5
  text "1" at -84.5,11.3 h1.5
  text "2" at -83.5,11.3 h1.5
  text "3" at -82.5,11.3 h1.5
  text "4" at -81.5,11.3 h1.5
  text "6" at -79.5,11.3 h1.5
  text "7" at -78.5,11.3 h1.5
  text "8" at -77.5,11.3 h1.5
  text "9" at -76.5,11.3 h1.5
  text "1" at -74.5,11.3 h1.5
  text "2" at -73.5,11.3 h1.5
  text "3" at -72.5,11.3 h1.5
  text "4" at -71.5,11.3 h1.5
  text "6" at -69.5,11.3 h1.5
  text "7" at -68.5,11.3 h1.5
  text "8" at -67.5,11.3 h1.5
  text "9" at -66.5,11.3 h1.5
  text "1" at -64.5,11.3 h1.5
  text "2" at -63.5,11.3 h1.5
  text "3" at -62.5,11.3 h1.5
  text "4" at -61.5,11.3 h1.5
  text "6" at -59.5,11.3 h1.5
  text "7" at -58.5,11.3 h1.5
  text "8" at -57.5,11.3 h1.5
  text "9" at -56.5,11.3 h1.5
  text "1" at -54.5,11.3 h1.5
  text "2" at -53.5,11.3 h1.5
  text "3" at -52.5,11.3 h1.5
  text "4" at -51.5,11.3 h1.5
  text "6" at -49.5,11.3 h1.5
  text "7" at -48.5,11.3 h1.5
  text "8" at -47.5,11.3 h1.5
  text "9" at -46.5,11.3 h1.5
  text "1" at -44.5,11.3 h1.5
  text "2" at -43.5,11.3 h1.5
  text "3" at -42.5,11.3 h1.5
  text "4" at -41.5,11.3 h1.5
  text "6" at -39.5,11.3 h1.5
  text "7" at -38.5,11.3 h1.5
  text "8" at -37.5,11.3 h1.5
  text "9" at -36.5,11.3 h1.5
  text "1" at -34.5,11.3 h1.5
  text "2" at -33.5,11.3 h1.5
  text "3" at -32.5,11.3 h1.5
  text "4" at -31.5,11.3 h1.5
  text "6" at -29.5,11.3 h1.5
  text "7" at -28.5,11.3 h1.5
  text "8" at -27.5,11.3 h1.5
  text "9" at -26.5,11.3 h1.5
  text "1" at -24.5,11.3 h1.5
  text "2" at -23.5,11.3 h1.5
  text "3" at -22.5,11.3 h1.5
  text "4" at -21.5,11.3 h1.5
  text "6" at -19.5,11.3 h1.5
  text "7" at -18.5,11.3 h1.5
  text "8" at -17.5,11.3 h1.5
  text "9" at -16.5,11.3 h1.5
  text "2" at 3.088,11.114 h1.5 r340
  text "3" at 4.971,10.409 h1.5 r330
  text "5" at -180.6,10 h1.5
  text "5" at -170.6,9.95 h1.5
  text "5" at -160.6,9.95 h1.5
  text "5" at -150.6,9.95 h1.5
  text "5" at -140.6,9.95 h1.5
  text "5" at -130.6,9.95 h1.5
  text "5" at -120.6,9.95 h1.5
  text "5" at -110.6,9.95 h1.5
  text "5" at -100.6,9.95 h1.5
  text "5" at -90.6,9.95 h1.5
  text "5" at -80.6,9.95 h1.5
  text "5" at -70.6,9.95 h1.5
  text "5" at -60.6,9.95 h1.5
  text "5" at -50.6,9.95 h1.5
  text "5" at -40.6,9.95 h1.5
  text "5" at -30.6,9.95 h1.5
  text "5" at -20.6,9.95 h1.5
  text "4" at 6.703,9.388 h1.5 r320
  text "0" at -187.2,8.5 h3
  text "1" at -177.2,8.5 h3
  text "2" at -167.2,8.5 h3
  text "3" at -157.2,8.5 h3
  text "4" at -147.2,8.5 h3
  text "5" at -137.2,8.5 h3
  text "6" at -127.2,8.5 h3
  text "7" at -117.2,8.5 h3
  text "8" at -107.2,8.5 h3
  text "9" at -97.2,8.5 h3
  text "10" at -88.2,8.5 h3
  text "11" at -78.2,8.5 h3
  text "12" at -68.2,8.5 h3
  text "13" at -58.2,8.5 h3
  text "14" at -48.2,8.5 h3
  text "15" at -38.2,8.5 h3
  text "16" at -28.2,8.5 h3
  text "17" at -18.2,8.5 h3
  text "5" at 8.231,8.081 h1.5 r310
  text "6" at 9.509,6.529 h1.5 r300
  text "5°" at -2.8,6.3 h3
  text "7" at 10.499,4.779 h1.5 r290
  text "PCB Common" at -182.614,3.498 h2.3
  text "8" at 11.169,2.883 h1.5 r280
  text "10°" at -2.7,1.5 h1.5
  text "Footprint:" at -182.755,0.994 h2.3
  text "9" at 11.5,0.9 h1.5 r270
  text "10" at 11.603,-0.421 h1.5 r260
  text "11" at 11.354,-2.43 h1.5 r250
  text "Zero Ruler V2" at -182.239,-3.14 h2.3
  text "12" at 10.759,-4.364 h1.5 r240
  text "By Toney" at -182.122,-5.984 h2.3
  text "13" at 9.838,-6.166 h1.5 r230
  text "Inch" at -12.7,-7.112 h1.27 r180
  text "7" at -186.85,-7.65 h3 r180
  text "6" at -161.5,-7.65 h3 r180
  text "5" at -136.1,-7.65 h3 r180
  text "4" at -110.7,-7.65 h3 r180
  text "3" at -85.3,-7.65 h3 r180
  text "2" at -59.9,-7.65 h3 r180
  text "1" at -34.5,-7.65 h3 r180
  text "0" at -9.1,-7.65 h3 r180
  text "14" at 8.618,-7.781 h1.5 r220
  text "5" at -175.768,-8.382 h1.5 r180
  text "5" at -150.368,-8.382 h1.5 r180
  text "5" at -124.968,-8.382 h1.5 r180
  text "5" at -99.568,-8.382 h1.5 r180
  text "5" at -74.168,-8.382 h1.5 r180
  text "5" at -48.768,-8.382 h1.5 r180
  text "5" at -23.368,-8.382 h1.5 r180
  text "15" at 7.136,-9.159 h1.5 r210
  text "9" at -185.928,-9.398 h1.5 r180
  text "8" at -183.388,-9.398 h1.5 r180
  text "7" at -180.848,-9.398 h1.5 r180
  text "6" at -178.308,-9.398 h1.5 r180
  text "4" at -173.228,-9.398 h1.5 r180
  text "3" at -170.688,-9.398 h1.5 r180
  text "2" at -168.148,-9.398 h1.5 r180
  text "1" at -165.608,-9.398 h1.5 r180
  text "9" at -160.528,-9.398 h1.5 r180
  text "8" at -157.988,-9.398 h1.5 r180
  text "7" at -155.448,-9.398 h1.5 r180
  text "6" at -152.908,-9.398 h1.5 r180
  text "4" at -147.828,-9.398 h1.5 r180
  text "3" at -145.288,-9.398 h1.5 r180
  text "2" at -142.748,-9.398 h1.5 r180
  text "1" at -140.208,-9.398 h1.5 r180
  text "9" at -135.128,-9.398 h1.5 r180
  text "8" at -132.588,-9.398 h1.5 r180
  text "7" at -130.048,-9.398 h1.5 r180
  text "6" at -127.508,-9.398 h1.5 r180
  text "4" at -122.428,-9.398 h1.5 r180
  text "3" at -119.888,-9.398 h1.5 r180
  text "2" at -117.348,-9.398 h1.5 r180
  text "1" at -114.808,-9.398 h1.5 r180
  text "9" at -109.728,-9.398 h1.5 r180
  text "8" at -107.188,-9.398 h1.5 r180
  text "7" at -104.648,-9.398 h1.5 r180
  text "6" at -102.108,-9.398 h1.5 r180
  text "4" at -97.028,-9.398 h1.5 r180
  text "3" at -94.488,-9.398 h1.5 r180
  text "2" at -91.948,-9.398 h1.5 r180
  text "1" at -89.408,-9.398 h1.5 r180
  text "9" at -84.328,-9.398 h1.5 r180
  text "8" at -81.788,-9.398 h1.5 r180
  text "7" at -79.248,-9.398 h1.5 r180
  text "6" at -76.708,-9.398 h1.5 r180
  text "4" at -71.628,-9.398 h1.5 r180
  text "3" at -69.088,-9.398 h1.5 r180
  text "2" at -66.548,-9.398 h1.5 r180
  text "1" at -64.008,-9.398 h1.5 r180
  text "9" at -58.928,-9.398 h1.5 r180
  text "8" at -56.388,-9.398 h1.5 r180
  text "7" at -53.848,-9.398 h1.5 r180
  text "6" at -51.308,-9.398 h1.5 r180
  text "4" at -46.228,-9.398 h1.5 r180
  text "3" at -43.688,-9.398 h1.5 r180
  text "2" at -41.148,-9.398 h1.5 r180
  text "1" at -38.608,-9.398 h1.5 r180
  text "9" at -33.528,-9.398 h1.5 r180
  text "8" at -30.988,-9.398 h1.5 r180
  text "7" at -28.448,-9.398 h1.5 r180
  text "6" at -25.908,-9.398 h1.5 r180
  text "4" at -20.828,-9.398 h1.5 r180
  text "3" at -18.288,-9.398 h1.5 r180
  text "2" at -15.748,-9.398 h1.5 r180
  text "1" at -13.208,-9.398 h1.5 r180
  text "16" at 5.437,-10.259 h1.5 r200
  text "17" at 3.573,-11.047 h1.5 r190
  text "18" at 1.6,-11.5 h1.5 r180
Solder Mask Bottom:
  drawing of 294 lines, arcs and shapes, not listed
  text "ABCDEFG 0.6MM" at -31.534,13.422 h0.3 r180
  text "MM" at -36.6,13.2 h2.38 r180
  text "3.0" at -43.733,12.543 h0.64 r180
  text "ABCDEFG 0.8MM" at -31.661,12.075 h0.4 r180
  text "0" at -0.3,11.4 h1.5
  text "0" at -0.3,11.4 h1.5
  text "1" at 1.684,11.279 h1.5 r350
  text "2.5" at -5.078,10.809 h0.64 r270
  text "2" at 3.617,10.815 h1.5 r340
  text "ABCDEFG 1.0MM" at -31.73,10.432 h0.5 r180
  text "3" at 5.44,10.023 h1.5 r330
  text "1.4" at -13.356,9.116 h0.64 r180
  text "4" at 7.098,8.926 h1.5 r320
  text "ABCDEFG 1.27MM" at -31.899,8.66 h0.64 r180
  text "2.5" at -43.9,8.6 h0.64 r180
  text "0.2" at -18.078,8.45 h0.64 r180
  text "0.3" at -15.283,7.642 h0.64 r180
  text "5" at 8.54,7.558 h1.5 r310
  text "1.5" at -10.344,7.244 h0.64 r180
  text "3.0" at -4.825,7.126 h0.64 r270
  text "2.0" at -43.948,6.796 h0.64 r180
  text "0.5" at -18.124,6.748 h0.64 r180
  text "ABCDEFG1.524MM" at -32.084,6.357 h0.76 r180
  text "6" at 9.723,5.96 h1.5 r300
  text "0.6" at -15.258,5.593 h0.64 r180
  text "Unit" at -35.5,5 h2.38 r270
  text "1.6" at -13.552,4.755 h0.64 r180
  text "1.7" at -43.72,4.673 h0.64 r180
  text "0.7" at -18.104,4.533 h0.64 r180
  text "7" at 10.61,4.181 h1.5 r290
  text "ABCDEFG 2.0MM" at -32.103,3.893 h1 r180
  text "MM" at -35.842,3.292 h2 r180
  text "3.5" at -4.634,3.273 h0.64 r270
  text "0.8" at -15.154,3.213 h0.64 r180
  text "1.7" at -9.959,2.656 h0.64 r180
  text "1.524" at -45,2.565 h0.64 r180
  text "8" at 11.175,2.275 h1.5 r280
  text "0.9" at -18.131,1.925 h0.64 r180
  text "K&S 3.0MM" at -32.408,1.025 h3 r180
  text "1.27" at -44.385,0.707 h0.64 r180
  text "1.0" at -15.146,0.552 h0.64 r180
  text "9" at 11.4,0.3 h1.5 r270
  text "1.8" at -13.618,-0.045 h0.64 r180
  text "1.0" at -43.667,-0.764 h0.64 r180
  text "4.0" at -4.573,-1.068 h0.64 r270
  text "1.1" at -18.079,-1.238 h0.64 r180
  text "10°" at -2.1,-1.5 h1.5 r180
  text "10" at 11.279,-1.684 h1.5 r260
  text "0.9" at -43.806,-2.083 h0.64 r180
  text "1.9" at -10.004,-2.289 h0.64 r180
  text "1.2" at -14.974,-2.872 h0.64 r180
  text "K&S 2.54MM" at -32.203,-2.983 h2.54 r180
  text "Unit" at -35.376,-3.064 h2 r270
  text "0.8" at -43.8,-3.4 h0.64 r180
  text "11" at 10.815,-3.617 h1.5 r250
  text "MM" at -35.65,-4.391 h1.5 r180
  text "1.3" at -18.072,-4.823 h0.64 r180
  text "2.0" at -13.907,-4.844 h0.64 r180
  text "0.7" at -43.816,-4.863 h0.64 r180
  text "12" at 10.023,-5.44 h1.5 r240
  text "4.5" at -4.55,-5.969 h0.64 r270
  text "KickStarter 2.0MM" at -31.883,-6.205 h2 r180
  text "0.6" at -43.857,-6.331 h0.64 r180
  text "5°" at -2.5,-6.7 h3 r180
  text "13" at 8.926,-7.098 h1.5 r230
  text "0.5" at -43.785,-7.673 h0.64 r180
  text "14" at 7.558,-8.54 h1.5 r220
  text "KickStarter 1.524MM" at -31.566,-8.918 h1.52 r180
  text "0.4" at -43.679,-8.991 h0.64 r180
  text "Unit" at -35.376,-9.114 h1.5 r270
  text "15" at 5.96,-9.723 h1.5 r210
  text "0.3" at -36.506,-9.922 h0.64 r180
  text "16" at 4.181,-10.61 h1.5 r200
  text "KickStarter 1.27MM" at -31.423,-10.939 h1.27 r180
  text "0.254" at -45.148,-11.015 h0.64 r180
  text "17" at 2.275,-11.175 h1.5 r190
  text "18" at 0.3,-11.4 h1.5 r180
  text "5.0" at -4.367,-11.45 h0.64 r270
  text "0.1524" at -36.505,-11.719 h0.64 r180
  text "1°" at -2.4,-11.8 h3 r180
  text "0.127" at -44.792,-12.494 h0.64 r180
  text "KickStarter 1.0MM" at -31.258,-12.941 h1 r180
  text "0.1MM" at -36.406,-13.383 h0.64 r180
Assembly Drawing Top:
  lines w0.01: -189.361,-15 -189.361,15 ; -189.361,-15 -189.361,15 ; -189.361,-15 0,-15 ccw(c0,0) 0,15 -189.361,15 ; -2,-11 -2,-9 0,-9 ccw(c0,0) 0,9 -2,9 -2,11 0,11 cw(c0,0) 0,-11 -2,-11 ; -2,-5 -2,-3 0,-3 ccw(c0,0) 0,3 -2,3 -2,5 0,5 cw(c0,0) 0,-5 -2,-5